# Allegro board Board_V_1_0 - Kopie.brd
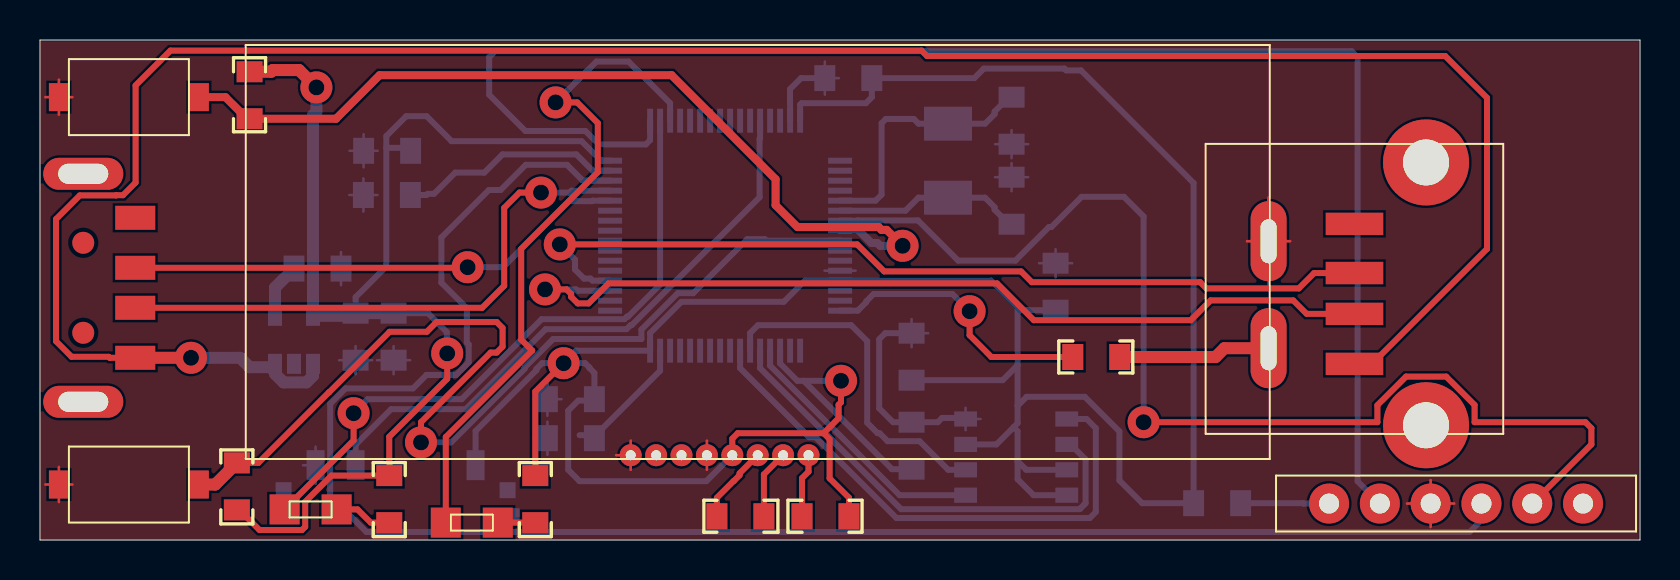
[diagram p0: board, top side]
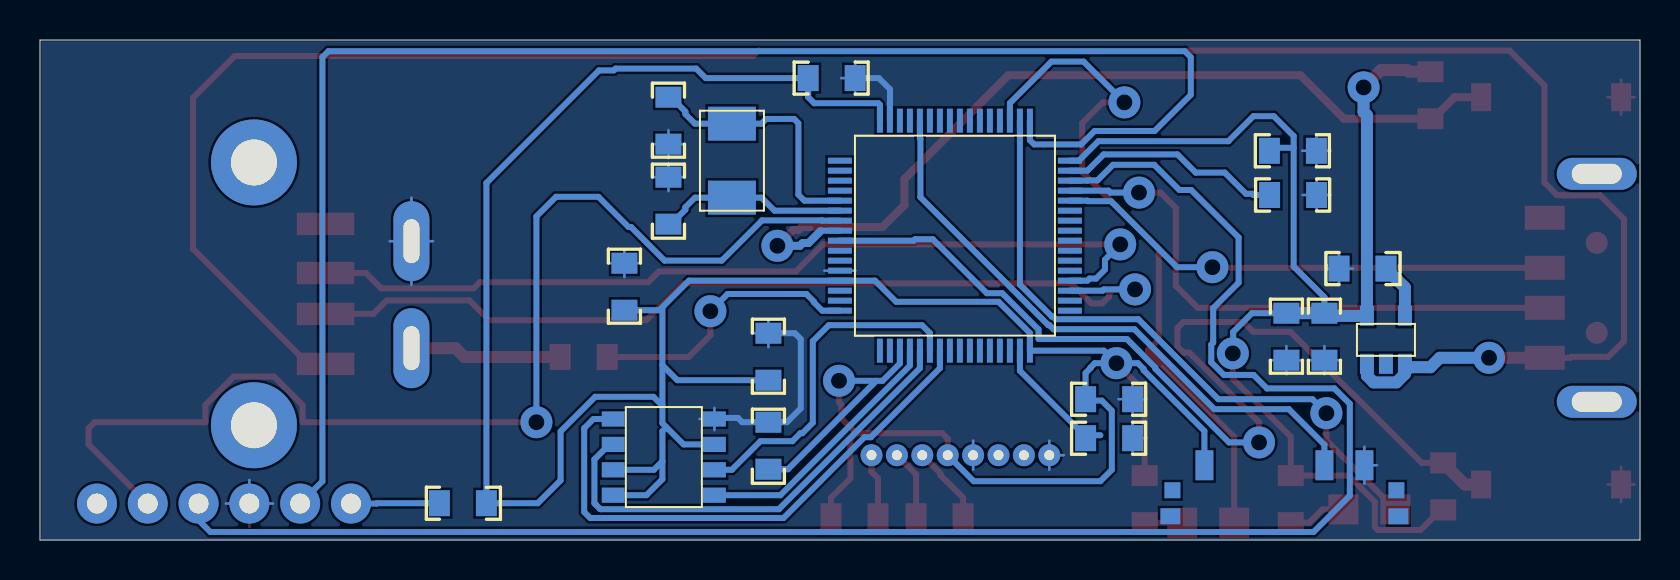
[diagram p1: board, bottom side, seen from below]

Outline 80 x 25 mm; copper layers: TOP, BOTTOM. Coordinates in mm from the lower left corner of the outline.
Outline path: 0,25 0,0 80,0 80,25 0,25

## Placement (name value [footprint] x y rotation side)
C1  C_0805  [0805]  48.58 15.79 90 bottom
C2  C_0805  [0805]  48.58 22.14 270 bottom
C3  C_0805  [0805]  41.59 23.09 180 bottom
C4  C_0805  [0805]  18.52 17.25 180 bottom
C5  C_0805  [0805]  18.53 19.46 180 bottom
C6  C_0805  [0805]  50.78 13.84 270 bottom
C7  C_0805  [0805]  15.78 11.34 270 bottom
C8  C_0805  [0805]  17.68 11.34 270 bottom
C9  C_0805  [0805]  12.7 13.57 0 bottom
C10  C_0805  [0805]  27.72 5.09 180 bottom
C11  C_0805  [0805]  27.72 7.04 180 bottom
C12  C_0805  [0805]  36.19 1.19 180 top
C13  C_0805  [0805]  38.1 1.19 0 top
C14  C_0805  [0805]  43.58 10.34 270 bottom
C15  C_0805  [0805]  43.58 3.54 90 bottom
D1  LED  [KINGBRIGHT_KPJA2107]  21.59 0.87 0 top
D2  LED  [KINGBRIGHT_KPJA2107]  13.53 1.53 0 top
J1  CON6  [PINHEAD_6]  64.45 1.82 90 top
P1  USB_A_FEMALE  [USBFEMALETYPA]  65.72 8.81 180 top
R1  R_0805  [0805]  24.76 0.87 90 top
R2  R_0805  [0805]  17.46 0.87 90 top
R3  R_0805  [0805]  10.48 23.41 270 top
R4  R_0805  [0805]  9.84 1.5 90 top
R5  R_0805  [0805]  57.68 1.84 0 bottom
R6  R_0805  [0805]  51.64 9.15 0 top
SW1  Schalter  [PRGSWITCH]  17.78 1.19 180 bottom
SW2  Taster  [PUSH_BUTTON_KSR221]  4.44 22.14 0 top
SW3  Taster  [PUSH_BUTTON_KSR221]  4.44 2.78 0 top
U1  XTAL  [CRYSTAL]  45.4 18.97 90 bottom
U2  USB_A_MALE  [USBMALETYPA]  4.76 16.11 0 top
U3  <VALUE>  [STM32F205]  40 18.97 180 bottom
U4  MIDAS_LCD  [DISPLAY]  33.98 4.24 270 top
U5  MIC5265  [SOT23-5]  13.65 8.81 90 bottom
U6  S25FL208K  [SOIC8_N]  46.28 2.24 0 bottom

## Library data of the parts
C1-C15 = C_0805
D1 D2 = LED
J1 = CON6
P1 = USB_A_FEMALE
R1-R6 = R_0805
SW1 = Schalter
SW2 SW3 = Taster
U1 = XTAL
U2 = USB_A_MALE
U3 = STM32F205
U4 = MIDAS_LCD_0
U5 = MIC5265
U6 = S25FL208K

## Footprints (pads in the part's own frame, mm; a bottom-side part is the same pattern mirrored in y, then rotated)
0805
  rect 1.05x1.3 smd: 1(0,0) 2(2.35,0)
CRYSTAL
  rect 1.7x2.4 smd: 1(-1.85,0) 2(1.85,0)
DISPLAY
  round 1.1 hole 0.5: 1(0,4.445) 2(0,3.175) 3(0,1.905) 4(0,0.635) 5(0,-0.635) 6(0,-1.905) 7(0,-3.175) 8(0,-4.445)
  oval 4x1.8 hole 2.2x0.8: A(-5.35,27.45) K(-10.7,27.45)
KINGBRIGHT_KPJA2107
  rect 1.5x1.5 smd: 1(-1.3,0) 2(1.3,0)
PINHEAD_6
  round 2 hole 1 unplated: (0,0) (0,-2.54) (0,-5.08) (0,-7.62) (0,-10.16) (0,-12.7)
PRGSWITCH
  rect 1x0.8 smd: (-5.7,0) (5.7,0)
  rect 0.8x0.8 smd: (-5.6,1.3) (5.6,1.3)
  rect 0.9x1.5 smd: 1(-4,2.55) 2(2,2.55) 3(4,2.55)
PUSH_BUTTON_KSR221
  rect 1x1.4 smd: 1(-3.5,0) 2(3.5,0)
SOIC8_N
  rect 1.143x0.76 smd: 1(0,0) 2(0,-1.27) 3(0,-2.54) 4(0,-3.81) 5(5.06,-3.81) 6(5.06,-2.54) 7(5.06,-1.27) 8(5.06,0)
SOT23-5
  rect 1x0.7 smd: 1(0,0) 2(0,-0.95) 3(0,-1.9) 4(2.4,-1.9) 5(2.4,0)
STM32F205
  rect 1.2x0.3 smd: 1(0,0) 2(0,-0.5) 3(0,-1) 4(0,-1.5) 5(0,-2) 6(0,-2.5) 7(0,-3) 8(0,-3.5) 9(0,-4) 10(0,-4.5) 11(0,-5) 12(0,-5.5) 13(0,-6) 14(0,-6.5) 15(0,-7) 16(0,-7.5) 33(11.5,-7.5) 34(11.5,-7) 35(11.5,-6.5) 36(11.5,-6) 37(11.5,-5.5) 38(11.5,-5) 39(11.5,-4.5) 40(11.5,-4) 41(11.5,-3.5) 42(11.5,-3) 43(11.5,-2.5) 44(11.5,-2) 45(11.5,-1.5) 46(11.5,-1) 47(11.5,-0.5) 48(11.5,0)
  rect 0.3x1.2 smd: 17(2,-9.5) 18(2.5,-9.5) 19(3,-9.5) 20(3.5,-9.5) 21(4,-9.5) 22(4.5,-9.5) 23(5,-9.5) 24(5.5,-9.5) 25(6,-9.5) 26(6.5,-9.5) 27(7,-9.5) 28(7.5,-9.5) 29(8,-9.5) 30(8.5,-9.5) 31(9,-9.5) 32(9.5,-9.5) 49(9.5,2) 50(9,2) 51(8.5,2) 52(8,2) 53(7.5,2) 54(7,2) 55(6.5,2) 56(6,2) 57(5.5,2) 58(5,2) 59(4.5,2) 60(4,2) 61(3.5,2) 62(3,2) 63(2.5,2) 64(2,2)
USBFEMALETYPA
  round 4.3 hole 2.3: (-3.58,3.07) (-3.58,-10.07)
  rect 2.88x1.12 smd: 1(0,0) 2(0,-2.5) 3(0,-4.54) 4(0,-7)
USBMALETYPA
  oval 4x1.6 hole 2.5x1: (-2.6,2.2) (-2.6,-9.2)
  round 1.1 smd: (-2.6,-1.25) (-2.6,-5.75)
  rect 2x1.2 smd: 1(0,-7) 2(0,-4.5) 3(0,-2.5) 4(0,0)

## Nets
3V3: C3.1 C5.1 C6.2 C7.1 C8.1 C11.1 C13.2 C14.2 C15.1 R1.2 R2.2 R3.1 R4.1 R5.1 SW1.1 U3.13(VDDA) U3.19(VDD#19) U3.32(VDD#32) U3.48(VDD#48) U3.64(VDD#64) U4.4(VDD) U5.5(OUT) U6.3(WP#) U6.7(HOLD#) U6.8(VCC)
GND: C1.2 C2.2 C3.2 C4.2 C5.2 C6.1 C7.2 C8.2 C9.2 C10.2 C11.2 C14.1 C15.2 SW1.3 SW2.1 SW3.1 U3.12(VSSA) U3.18(VSS#18) U3.63(VSS#63) U4.5(VSS) U4.8(RST) U4.K U6.4(GND)
GND_SIGNAL: P1.4(-) U2.4(-) U5.2(GND)
VBAT: U3.1(VBAT)
NRST: U3.7(NRST)
VUSB: P1.1(+) U2.1(+) U5.1(VIN) U5.3(EN)
N05358: C4.1 U3.47(VCAP_2)
N05450: C10.1 U3.31(VCAP_1)
N05685: SW1.2 U3.60(BOOT0)
N05689: U2.2(D-) U3.45(PA12)
N05714: U2.3(D+) U3.44(PA11)
N05739: P1.2(D-) U3.35(PB14)
N05751: P1.3(D+) U3.36(PB15)
N06248: U3.22(PA6) U6.2(SO)
N06281: U3.20(PA4) U6.1(CS#)
N07604: U3.21(PA5) U6.6(SCK)
N07637: U3.23(PA7) U6.5(SI)
N08036: R4.2 SW3.2 U3.9(PC1)
N08040: R3.2 SW2.2 U3.8(PC0)
N08183: C12.2 U4.3(CAP1P)
N08220: C13.1 U4.1(VOUT)
N08493: C12.1 U4.2(CAP1N)
N08729: C1.1 U1.1 U3.6(PH1)
N08747: C2.1 U1.2 U3.5(PH0)
N09420: D2.1(CATHODE) U3.50(PA15)
N09427: D1.1(CATHODE) U3.51(PC10)
N09557: D1.2(ANODE) R1.1
N09564: D2.2(ANODE) R2.1
N10949: R5.2
N11044: U3.49(PA14)
N11071: U3.46(PA13)
N12892: R6.2 U4.A
N12896: R6.1 U3.16(PA2)
N041153: C9.1 U5.4(BYP)

Pads without a net: U3 2 3 4 10 11 14 15 17 24 25 26 27 28 29 30 33 34 37 38 39 40 41 42 43 52 53 54 55 56 57 58 59 61 62; U4 6 7

## Via types
v1: diameter 1.6, hole 0.8, TOP to BOTTOM, 15 vias

## Routing (per net, layer and track width the routed paths; a pad name or vN(x,y) marks a point on that pad's centre or on a via; arc(x,y) is an arc through that point)
3V3: length 221.5
  TOP w0.3: 39.18,5.34 34.89,5.34 34.62,5.07 34.62,4.24 ; 39.18,5.34 39.48,5.04 39.48,3.08 40.45,2.11 C13.2 ; 39.18,5.34 39.93,6.09 39.93,6.76 40.05,6.88 v1(40.05,7.96) ; R1.2 24.76,7.43 v1(26.18,8.84) ; R4.1 9.97,1.5 10.97,0.5 13.1,0.5 13.26,0.66 13.26,1.91 14.57,3.22 R2.2 17.46,5.16 20.36,8.06 v1(20.36,9.33)
  TOP w0.6: v1(13.82,22.63) 12.95,23.5 11.64,23.5 11.55,23.41 R3.1
  BOTTOM w0.3: v1(20.36,9.33) 20.34,9.35 20.34,10.4 19.4,11.34 C8.1 ; 48.88,11.64 49.03,11.49 C6.2 ; 48.88,11.64 48.88,8.74 ; 48.88,11.64 47.55,12.97 U3.13 38.25,12.97 37.19,11.91 32.07,11.91 30.5,10.34 U3.32 26.81,9.47 v1(26.18,8.84) ; 48.88,6.71 48.88,5.84 48.68,5.64 ; 48.88,6.71 49.33,7.16 52.24,7.16 53.97,5.43 53.97,2.98 55.11,1.84 R5.1 57.68,17.85 52.05,23.48 51.31,23.48 51.22,23.57 47.19,23.57 46.72,23.09 C3.1 41.59,22.14 41.29,21.84 38.08,21.84 38,21.76 U3.64 ; 48.88,6.71 48.88,8.74 ; U3.19 37,8.82 37.87,7.96 38.18,7.96 ; U6.8 49.68,2.24 48.88,3.04 48.88,3.94 ; v1(26.18,8.84) 27.26,8.84 27.47,8.63 27.47,8.6 27.72,8.35 C11.1 27.65,6.97 26.91,6.97 26.41,6.47 26.41,3.51 26.98,2.94 33.31,2.94 34.62,4.24 ; v1(26.18,8.84) 25.1,8.84 24.82,8.56 24.82,8.49 21.78,5.45 SW1.1 ; 48.88,3.94 48.88,5.44 48.68,5.64 ; 48.88,3.94 49.31,3.51 U6.7 ; 48.88,8.74 48.13,7.99 C14.2 ; 38.18,7.96 42.6,3.54 C15.1 ; 38.18,7.96 v1(40.05,7.96) ; 48.68,5.64 47.82,4.78 U6.3 ; C7.1 15.78,12.14 17.32,13.68 17.32,19.61 ; 17.32,19.61 17.32,20.2 18.31,21.19 19.33,21.19 20.58,19.94 27.08,19.94 28.05,18.97 U3.48 ; 17.32,19.61 18.38,19.61 C5.1
  BOTTOM w0.6: v1(13.82,22.63) 13.82,21.4 13.65,21.24 U5.5 15.55,11.21 15.68,11.34 C7.1 C8.1
GND: length 87.2
  TOP w0.127: 0.94,21.26 SW2.1 ; SW2.1 1.62,22.14 ; SW2.1 0.94,23.02 ; SW2.1 0.27,22.14 ; U4.K 61.43,17.12 ; U4.K 60.35,14.94 ; U4.K 62.51,14.94 ; U4.8 29.53,4.97 ; U4.8 29.53,3.51 ; U4.8 28.81,4.24 ; 69.53,1.82 69.53,3 ; 69.53,1.82 68.35,1.82 ; 69.53,1.82 69.53,0.64 ; 69.53,1.82 70.71,1.82 ; SW3.1 0.94,3.65 ; SW3.1 0.27,2.78 ; SW3.1 0.94,1.9 ; SW3.1 1.62,2.78 ; 33.34,4.97 U4.5 33.34,3.51
  BOTTOM w0.127: 15.47,17.25 C4.2 ; C4.2 16.17,18.08 ; C4.2 16.87,17.25 ; C4.2 16.17,16.42 ; C9.2 15.05,14.4 ; C9.2 15.75,13.57 ; C9.2 14.35,13.57 ; C9.2 15.05,12.74 ; C7.2 15.78,9.69 ; C7.2 14.95,8.99 ; C7.2 15.78,8.29 ; C7.2 16.61,8.99 ; 43.58,9.64 C14.1 ; C14.1 43.58,11.04 ; C14.1 44.41,10.34 ; U6.4 46.28,6.61 ; U6.4 45.53,6.05 ; U6.4 47.03,6.05 ; U6.4 46.28,5.49 ; 24.67,7.04 C11.2 ; C11.2 25.37,7.87 ; C11.2 26.07,7.04 ; C11.2 25.37,6.21 ; C10.2 25.37,5.92 ; C10.2 25.37,4.26 ; C10.2 24.67,5.09 ; 13.15,3.74 SW1.3 ; SW1.3 13.78,2.81 ; SW1.3 13.78,4.67 ; 60.35,14.94 U4.K ; U4.K 62.51,14.94 ; U4.K 61.43,12.76 ; U4.K 61.43,17.12 ; 39.23,13.47 U3.12 40.78,13.47 ; 48.58,17.44 C1.2 ; C1.2 47.75,18.14 ; C1.2 48.58,18.85 ; C1.2 49.41,18.14 ; 69.53,1.82 69.53,3 ; 69.53,1.82 68.35,1.82 ; 69.53,1.82 70.71,1.82 ; 15.48,19.46 C5.2 ; C5.2 16.18,20.29 ; C5.2 16.18,18.63 ; C5.2 16.88,19.46 ; 48.58,19.09 C2.2 ; C2.2 47.75,19.79 ; C2.2 49.41,19.79 ; C2.2 48.58,20.5 ; 29.53,3.51 U4.8 ; U4.8 28.81,4.24 ; U4.8 29.53,4.97 ; 50.78,13.14 C6.1 ; C6.1 51.61,13.84 ; C6.1 50.78,14.54 ; C6.1 49.95,13.84 ; 39.24,22.27 C3.2 ; C3.2 39.95,23.09 ; C3.2 39.24,23.92 ; C8.2 17.68,9.69 ; C8.2 17.68,8.29 ; C8.2 18.51,8.99 ; C8.2 16.85,8.99 ; 33.34,4.97 U4.5 33.34,3.51
  BOTTOM w0.3: C3.2 38.06,23.09 37.5,22.54 37.5,21.85 37.5,21.84 U3.63 ; C14.1 42.26,10.34 41.96,10.04 41.96,6.58 42.65,5.89 C15.2 44.89,5.89 45.1,6.1 46.23,6.1 U6.4
NRST: length 58.4
  TOP w0.3: 74.61,1.82 77.57,4.78 77.57,5.59 77.27,5.89 71.73,5.89 71.73,6.75 70.31,8.17 68.3,8.17 66.87,6.74 66.87,5.89 v1(55.18,5.89)
  BOTTOM w0.3: U3.7 40.88,15.97 40.89,15.98 43.9,15.98 45.91,13.97 48.77,13.97 50.45,15.65 50.57,15.65 52.08,17.16 54.2,17.16 55.18,16.18 v1(55.18,5.89)
VUSB: length 116.4
  TOP w0.3: P1.1 66.6,8.81 72.35,14.55 72.35,22.11 70.26,24.2 44.35,24.2 44.08,24.47 6.52,24.47 4.78,22.73 4.78,17.87 4.15,17.24 3.82,17.24 3.81,17.23 1.99,17.23 0.8,16.04 0.8,9.94 1.58,9.16 3.44,9.16 3.49,9.11 U2.1
  TOP w0.6: U2.1 v1(7.55,9.11)
  BOTTOM w0.6: v1(7.55,9.11) 10.01,9.11 10.48,8.64 11.59,8.64 U5.3 11.75,8.3 12.18,7.88 13.32,7.88 13.65,8.21 U5.1
N05358: length 11.2
  BOTTOM w0.3: C4.1 19.32,17.25 19.38,17.31 19.7,17.31 20.76,18.37 22.22,18.37 23.12,19.28 26.82,19.28 27.63,18.47 U3.47
N05450: length 6.4
  BOTTOM w0.3: U3.31 31,8.46 27.78,5.24 26.98,5.24
N05685: length 30.2
  BOTTOM w0.3: U3.60 36,20.09 35.98,20.07 35.98,17.14 29.58,10.74 29.52,10.74 29.32,10.54 25.28,10.54 21.28,6.54 17.56,6.54 15.78,4.76 SW1.2
N05689: length 28.5
  TOP w0.3: U2.2 22.11,11.61 23.21,12.71 23.21,16.61 23.97,17.37 v1(25.05,17.37)
  BOTTOM w0.3: U3.45 26.58,17.47 26.48,17.37 v1(25.05,17.37)
N05714: length 25.1
  TOP w0.3: v1(21.38,13.64) 21.35,13.61 U2.3
  BOTTOM w0.3: v1(21.38,13.64) 23.15,13.64 26.45,16.94 27.6,16.94 27.63,16.97 U3.44
N05739: length 46
  TOP w0.3: v1(25.25,12.53) 26.33,12.53 26.56,12.3 26.56,12.16 26.89,11.83 27.43,11.83 28.43,12.83 47.85,12.83 49.69,10.99 57.54,10.99 58.53,11.98 62.66,11.98 63.33,11.31 P1.2
  BOTTOM w0.3: v1(25.25,12.53) 26.8,12.53 26.86,12.47 U3.35
N05751: length 44.5
  TOP w0.3: v1(25.99,14.78) 40.86,14.78 42.21,13.43 49.05,13.43 49.59,12.89 58.01,12.89 58.32,12.58 62.94,12.58 63.71,13.35 P1.3
  BOTTOM w0.3: U3.36 27.63,12.97 27.52,13.07 27.2,13.07 26.75,13.52 26.75,14.02 v1(25.99,14.78)
N06248: length 17.2
  BOTTOM w0.3: U3.22 35.5,10.34 35.9,10.74 40.56,10.74 41.36,9.94 41.36,5.86 41.88,5.34 41.98,5.34 42.38,4.94 43.98,4.94 45.41,3.51 U6.2
N06281: length 13.2
  BOTTOM w0.3: U3.20 36.5,8.72 42.98,2.24 U6.1
N07604: length 23.6
  BOTTOM w0.3: U3.21 36,8.59 43.06,1.54 51.98,1.54 52.02,1.58 52.03,1.58 52.19,1.75 52.19,1.75 52.28,1.84 52.28,4.03 51.53,4.78 U6.6
N07637: length 27.7
  BOTTOM w0.3: U3.23 35,8.59 38.46,5.14 38.78,5.14 42.82,1.1 52.49,1.1 52.79,1.4 52.79,5.59 52.33,6.05 U6.5
N08036: length 51.8
  TOP w0.3: v1(19.05,4.88) 19.05,5.89 22.53,9.37 22.83,9.37 23.13,9.67 23.13,10.6 22.83,10.9 19.83,10.9 19.34,10.41 17.48,10.41 14.45,7.38 14.44,7.38 10.91,3.85 R4.2
  TOP w0.6: R4.2 8.76,2.78 SW3.2
  BOTTOM w0.3: U3.9 36.31,14.97 36.24,15.04 35.36,15.04 32.66,12.34 31.89,12.34 30.07,10.52 30.07,10.05 25.66,10.05 24.23,8.62 24.23,8.56 20.55,4.88 v1(19.05,4.88)
N08040: length 44.3
  TOP w0.4: v1(43.13,14.71) 42.33,15.51 42.07,15.51 41.93,15.65 37.87,15.65 36.78,16.74 36.78,18.04 31.58,23.24 16.98,23.24 14.8,21.06 R3.2 10.35,21.06 9.27,22.14 SW2.2
  BOTTOM w0.3: 40.98,15.44 40.95,15.47 U3.8
  BOTTOM w0.4: v1(43.13,14.71) 42,14.71 41.86,14.85 41.57,14.85 40.98,15.44
N08183: length 3.9
  TOP w0.3: U4.3 34.98,3.34 34.98,3.24 34.68,2.94 34.67,2.94 33.84,2.11 C12.2
N08220: length 3.2
  TOP w0.3: C13.1 38.1,3.09 38.42,3.41 U4.1
N08493: length 3.5
  TOP w0.3: C12.1 36.19,3.28 U4.2
N08729: length 9.5
  BOTTOM w0.3: U3.6 43.28,16.47 43.93,17.12 U1.1 47.25,17.12 47.73,16.64 47.73,16.51 48.45,15.79 C1.1
N08747: length 13.1
  BOTTOM w0.3: C2.1 48.45,22.14 47.73,21.42 47.73,21.3 47.25,20.82 U1.2 43.93,20.82 43.69,21.05 42.29,21.05 42.08,20.84 42.08,17.27 41.78,16.97 U3.5
N09420: length 32.4
  TOP w0.3: D2.1 15.68,4.98 v1(15.68,6.34)
  BOTTOM w0.3: v1(15.68,6.34) 16.38,7.04 21.08,7.04 25.08,11.04 29.22,11.04 29.35,11.17 29.4,11.17 31,12.77 U3.50
N09427: length 34.4
  TOP w0.3: v1(25.78,21.88) 26.86,21.88 27.89,20.85 27.89,18.39 24.06,14.56 24.06,10.02 24.61,9.47 20.29,5.15 D1.1
  BOTTOM w0.3: v1(25.78,21.88) 27.82,23.92 29.43,23.92 31.5,21.84 U3.51
N09557: length 1.9
  TOP w0.3: R1.1 D1.2
N09564: length 2.9
  TOP w0.3: R2.1 16.54,0.87 15.88,1.53 D2.2
N10949: length 4.4
  BOTTOM w0.3: 64.45,1.82 63.18,1.82 63.16,1.84 R5.2
N11044: length 78.5
  BOTTOM w0.3: U3.49 30.5,19.99 30.29,19.78 27.94,19.78 27.27,20.45 24.27,20.45 22.46,22.26 22.46,24.14 22.76,24.44 65.58,24.44 65.88,24.14 65.88,2.94 66.99,1.82
N11071: length 88.9
  BOTTOM w0.3: U3.46 27.63,17.97 27.62,17.98 27.13,17.98 26.35,18.76 24.29,18.76 23.03,17.5 22.44,17.5 20.07,15.13 20.07,12.86 21.34,11.59 21.34,9.87 21.44,9.78 21.44,8.88 20.81,8.25 19.32,8.25 18.65,7.58 15.28,7.58 14.51,6.81 14.51,2.21 16.32,0.4 71.48,0.4 72.07,0.99 72.07,1.82
N12892: length 7.6
  TOP w0.6: U4.A 59.22,9.59 58.78,9.15 R6.2
N12896: length 14
  TOP w0.3: v1(46.48,11.44) 46.48,10.24 47.57,9.15 R6.1
  BOTTOM w0.3: v1(46.48,11.44) 45.62,12.3 41.68,12.3 41.31,11.93 41.31,11.89 40.89,11.47 U3.16
N041153: length 2.8
  BOTTOM w0.6: C9.1 11.75,12.62 U5.4

## Copper pours and planes (outline as drawn; the poured copper is in the pictures)
GND on TOP, BOTTOM: 0.01,0.01 0.01,24.94 79.94,24.94 79.94,0.01
